# Altium PCB recall_mcu_2L_v0_1.PcbDoc
Units mil, origin at the board's own origin, x right, y up, seen from the top; angles counter-clockwise.
Board outline 1000 x 1000 mil, 2 copper layers (Component Side, Bottom Layer), stack 12.8 mil thick; 11 components, 9 nets, 34 pads, 4 vias.
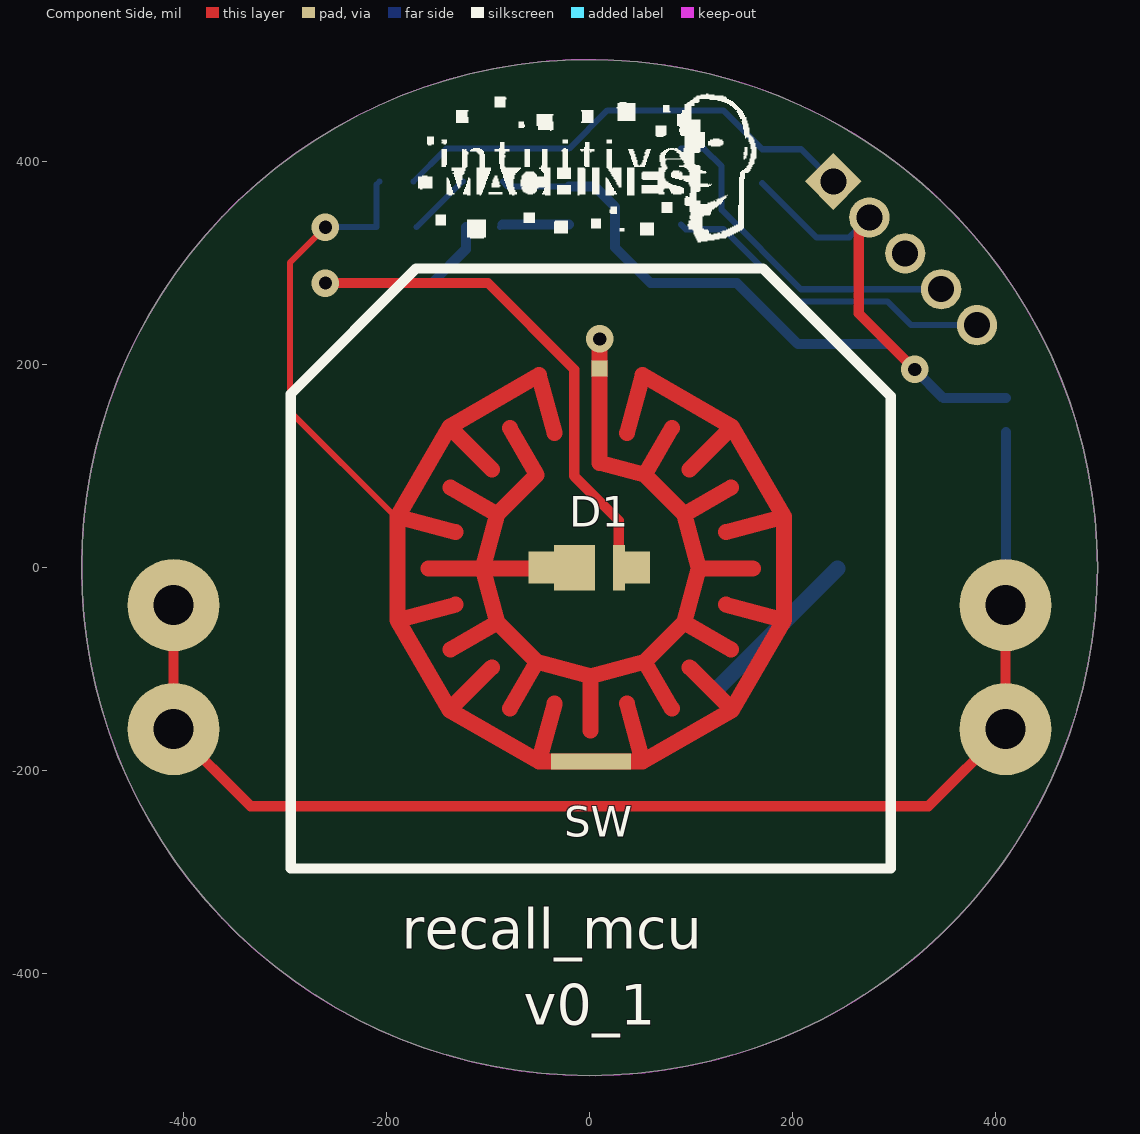
[diagram p0: Component Side view]
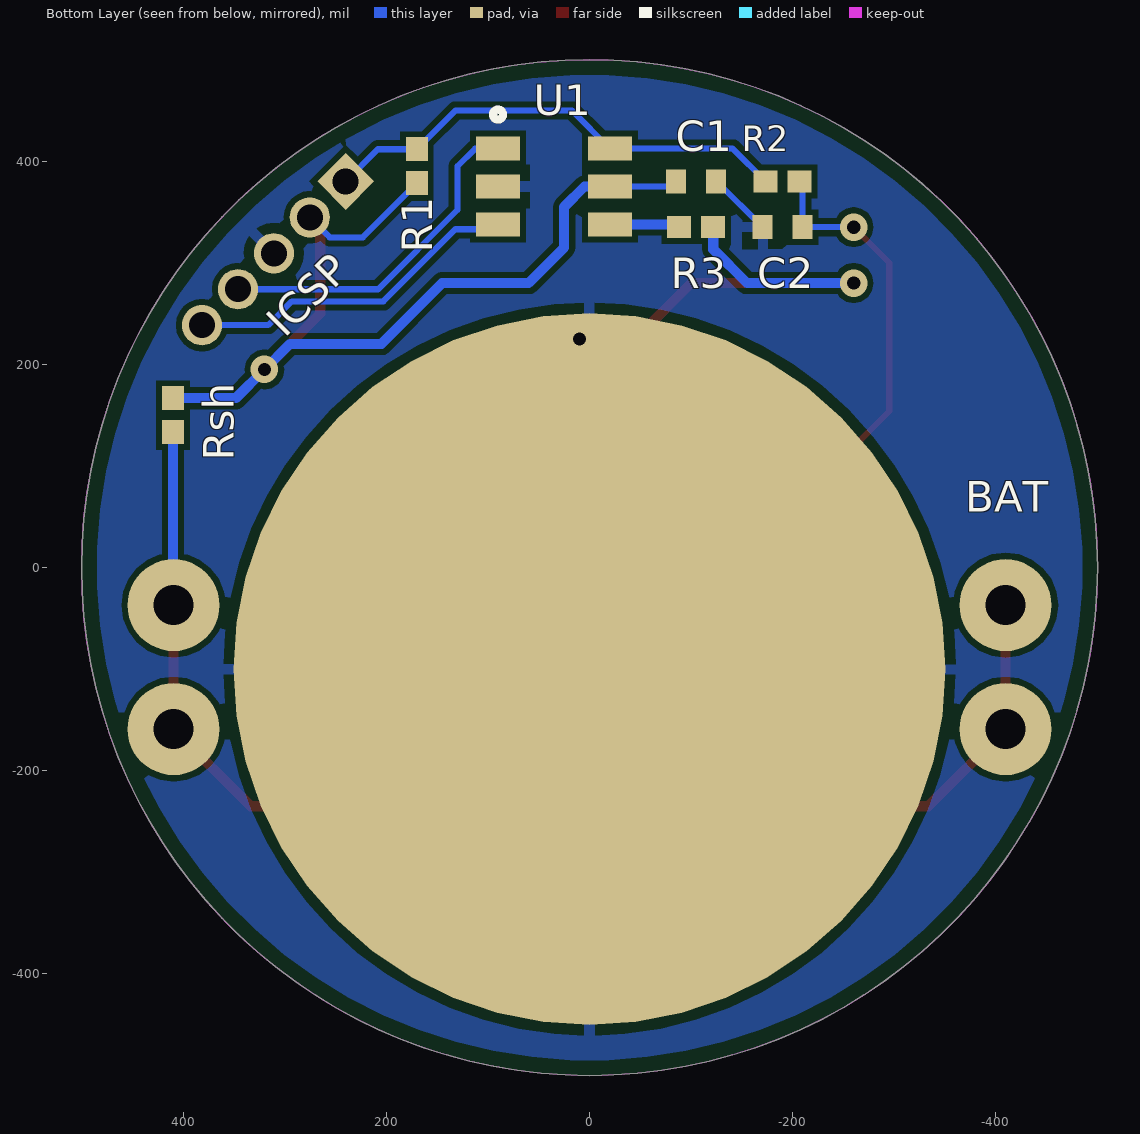
[diagram p1: Bottom Layer view, seen from below]
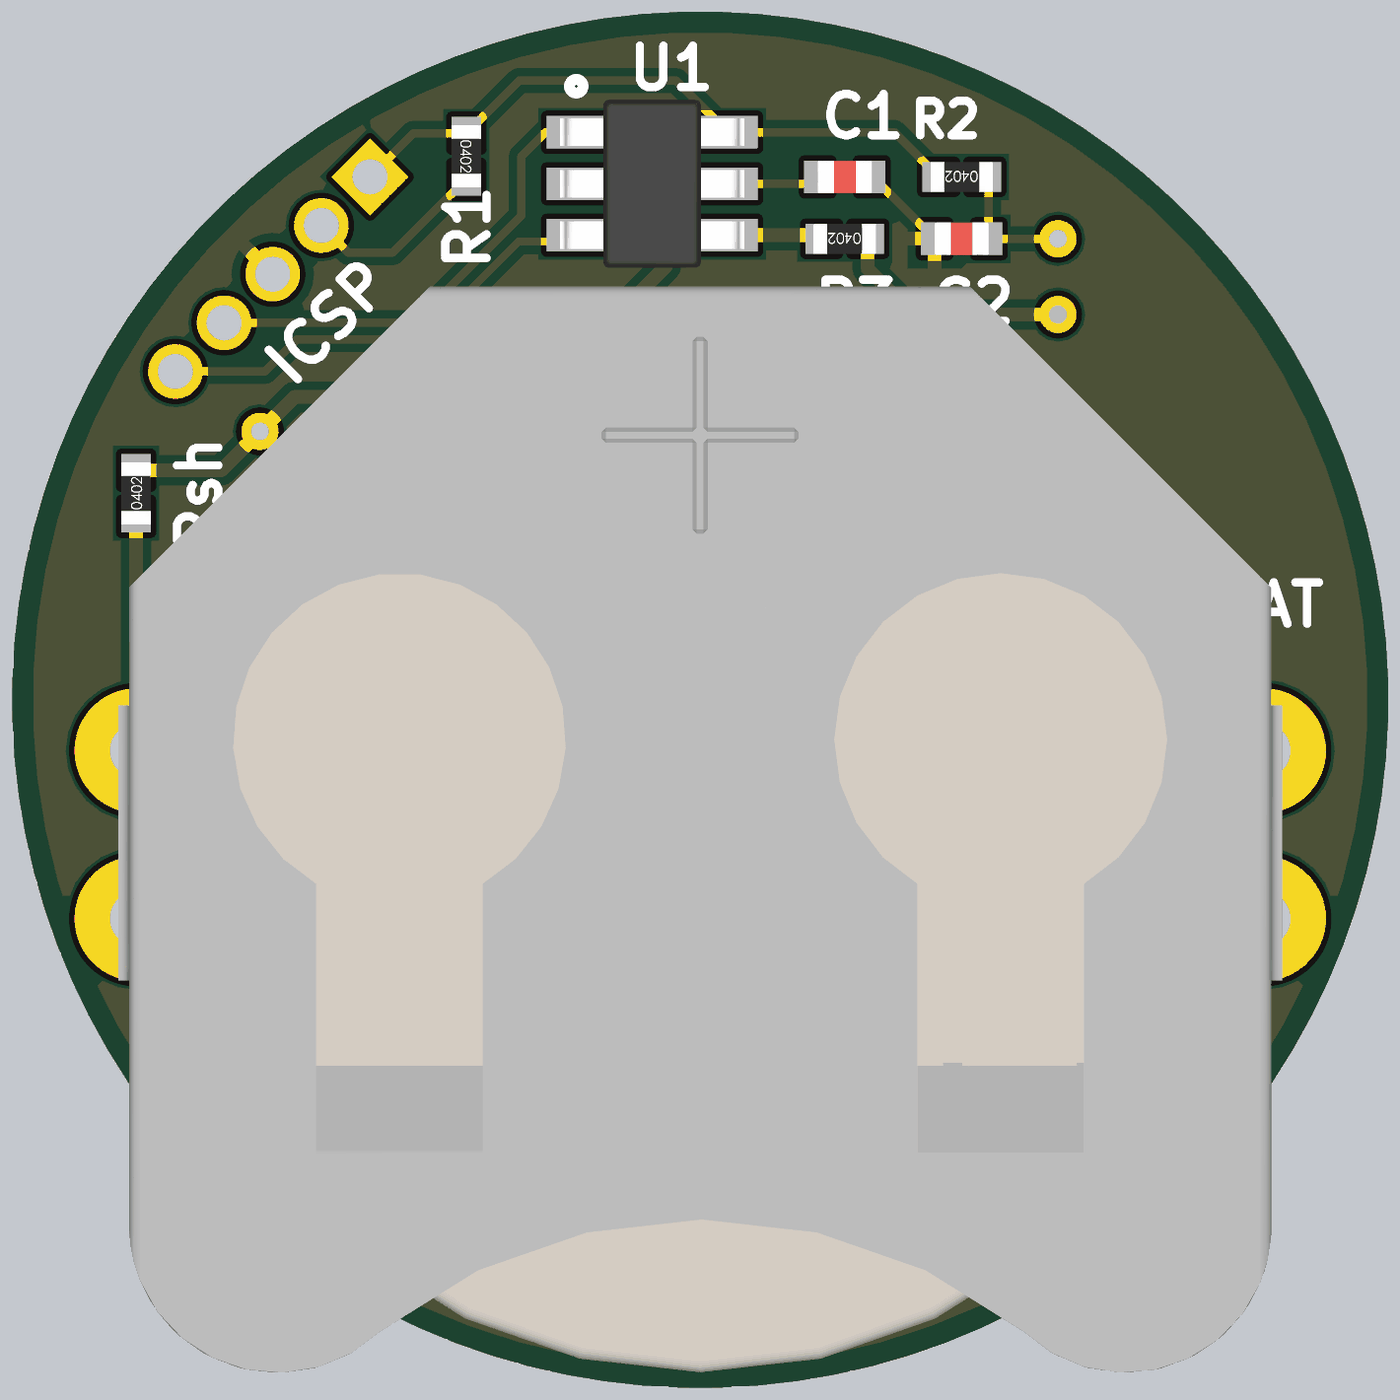
[diagram p2: 3D render of the assembled board from below, using the file's embedded part models]

## Layer stack, top to bottom
Top Solder: solder mask 0.4, Solder Resist, Dk 3.5
Component Side: signal copper 1.4
Dielectric 1: core 10, FR-4, Dk 4.2
Bottom Layer: signal copper 1.4
Solder Side: solder mask 0.4, Solder Resist, Dk 3.5

## Board outline
0,-500 cw(c0,0) -500,0 cw(c0,0) 0,500 cw(c0,0) 500,0 cw(c0,0)

## Design rules (kind name [scope] priority, off if disabled: settings)
BoardOutlineClearance [All] p1: gap=15
Clearance [All] p1: gap=6
HoleSize [All] p1: absolutevalues=TRUE maxlimit=100 minlimit=13 maxpercent=80.000 minpercent=20.000
HoleToHoleClearance [All] p1: gap=6 allowstackedmicrovias=TRUE
MinimumAnnularRing [All] p1: minimumring=7
MinimumSolderMaskSliver [All] p1: minsoldermaskwidth=0
PolygonConnect [All] p1: connectstyle=Relief reliefconductorwidth=10 reliefentries=4 polygonreliefangle="90 Angle" airgapwidth=10
RoomDefinition recall_mcu_2L_v0_1 [InComponentClass('recall_mcu_2L_v0_1')] p1: confinementstyle=ConfineIn formatcopy=TRUE lockcomponents=FALSE outline -3105,-2070 3685,-2070 3685,2625 -3105,2625
RoutingVias [All] p1: holewidth=13 width=27 viastyle="Through Hole" minholewidth=13 minwidth=27 maxholewidth=28 maxwidth=50
SilkToSilkClearance [All] p1: silktosilkclearance=6
SilkToSolderMaskClearance [IsPad] p1: minsilkscreentomaskgap=6 clearancetoexposedcopper=TRUE
SolderMaskExpansion [All] p1: expansion=4
Width [All] p1: maxlimit=50 minlimit=6 preferedwidth=6
25 further rules are at their usual default settings.

## Components (designator, comment, footprint, x,y, rotation, side; value= is the part's Value field where it differs from the comment)
BAT "CR2032" BAT-HLD-001-THM 0,-100 r0 bottom
C1 "CAP" CAP_0402R -105,380 r0 bottom
C2 "CAP" CAP_0402R -190,335 r180 bottom
D1 "MP2016" MP2016_centered 0,0 r0 top
ICSP "Header 5" HDR1X5_ICSP 240,380 r315 bottom
R1 "RES" RES_0402 170,395 r270 bottom
R2 "RES" RES_0402 -190,380 r0 bottom
R3 "RES" RES_0402 -105,335 r0 bottom
Rsh "RES" RES_0402 410,150 r90 bottom
SW "SW-PB" TRELLIS_1x1_2L 0,0 r90 top
U1 "PIC10F320" SOT-23-6 35,375 r180 bottom

## Footprints (in the part's own frame and the unit in brackets; to place one, negate y for a bottom-side part, rotate by r counter-clockwise, add the part's x,y. Pads: shape width x height; smd on the part's side, far side on the other; paste and mask are expansions set on the pad)
BAT-HLD-001-THM [mm] "Battery holder for CR2032"
  round 2.3 hole 1: 1(-10.4,-1.6) 1(-10.4,1.5) 1(10.4,-1.6) 1(10.4,1.5)
  round 17.8 smd: 2(0,0)
  body extent -10.74,-10.17 10.74,9.88, height 3.96
CAP_0402R [mm] "Capacitor 0402 reflow soldering"
  rect 0.5x0.6 smd: 1(-0.5,0) 2(0.5,0)
  body extent -0.5,-0.3 0.5,0.3, height 0.2
HDR1X5_ICSP [mm] "Connector; Header; 1x5Position"
  rect 1.006x1.006 hole 0.65: 1(0,0)
  round 1.006 hole 0.65: 2(1.27,0) 3(2.54,0) 4(3.81,0) 5(5.08,0)
MP2016_centered [mm] "Luminus XNOVA LED"
  rect 0.3x1.14 smd: A(0.731,0)
  rect 1.02x1.14 smd: C(-0.379,0)
  rect 0.65x0.8 smd: ""(-1.204,0) ""(1.181,0)
  body extent -1,-0.8 1,0.8, height 0.55
RES_0402 [mm]
  rect 0.6x0.55 smd: 1(-0.425,0) 2(0.425,0)
  body extent -0.58,-0.28 0.57,0.27, height 0.41
SOT-23-6 [mm] "PIC10F320"
  rect 1.1x0.6 smd: 1(-1.4,0.95) 2(-1.4,0) 3(-1.4,-0.95) 4(1.4,-0.95) 5(1.4,0) 6(1.4,0.95)
  silkscreen extent -1.53,1.68 -1.28,1.92, body extent -1.7,-1.55 1.7,1.55, height 1.14
TRELLIS_1x1_2L [mil]
  rect 15.75x78.74 smd: 1(-190.98,-1.57)
  rect 15.75x15.75 smd: 2(196,-10)
  Component Side lines w15.75: -0.83,158.28 -0.83,107.13 -0.83,106.79 -0.83,105.13 ; -80.55,136.91 -53.98,90.88 ; 78.9,136.91 52.32,90.88 ; -36.49,131.93 -51.78,188.97 ; 34.84,131.93 50.12,188.97 ; -98.26,96.26 -140.02,138.02 ; 96.61,96.26 138.37,138.02 ; -138.91,78.55 -92.88,51.98 ; 137.26,78.55 91.23,51.98 52.32,90.88 ; -133.93,34.49 -190.97,49.78 ; 132.27,34.49 189.32,49.78 138.37,138.02 ; -160.28,-1.17 -107.13,-1.17 ; 195,-10 103.1,-10 91.23,-54.32 ; -133.93,-36.84 -190.97,-52.12 ; 132.27,-36.84 189.32,-52.12 138.37,-140.37 ; -138.91,-80.9 -92.88,-54.32 ; 137.26,-80.9 91.23,-54.32 ; -98.26,-98.61 -140.02,-140.37 ; 96.61,-98.61 138.37,-140.37 ; -36.49,-134.27 -51.78,-191.32 ; 34.84,-134.27 50.12,-191.32 ; -80.55,-139.26 -53.98,-93.23 ; 78.9,-139.26 52.32,-93.23 ; -0.83,-160.62 -0.83,-107.47 ; -51.78,188.97 50.12,188.97 ; -51.78,188.97 -140.02,138.02 ; 50.12,188.97 138.37,138.02 ; -140.02,138.02 -190.97,49.78 ; -0.83,105.13 52.32,90.88 ; -0.83,105.13 -1.17,105.04 -53.98,90.88 ; -53.98,90.88 -92.88,51.98 ; -92.88,51.98 -107.13,-1.17 ; -190.97,49.78 -190.97,-52.12 ; -107.13,-1.17 -92.88,-54.32 ; -190.97,-52.12 -140.02,-140.37 ; -92.88,-54.32 -53.98,-93.23 ; 91.23,-54.32 52.32,-93.23 ; -53.98,-93.23 -0.83,-107.47 ; 52.32,-93.23 -0.83,-107.47 ; -140.02,-140.37 -51.78,-191.32 ; 138.37,-140.37 50.12,-191.32 ; -51.78,-191.32 50.12,-191.32
  silkscreen extent -296,-296 294,294, body extent -296,-297 295,294, height 455

## Part data
BAT: library part Battery
C1 C2: "Capacitor"
D1: "MP2016 White LED"
ICSP: "Header, 5-Pin"
R1 R2 R3 Rsh: "Resistor"
SW: "Translucent Conductive Silicone Elastomer Switch"
U1: "6-Pin Flash-Based, 8-Bit Microcontroller"

## Via types
v1: diameter 27, hole 13, Component Side to Bottom Layer, 4 vias

## Nets (pads, with @x,y where several pads share a name; then routed paths per layer and width w, separated by ;. In a path a pad name is that pad's centre, name@x,y a point inside that pad or via, vN(x,y) a via of type N, cw(c..) or ccw(c..) an arc to the next point about the centre after c; other vN are vias at no path point)
GND: BAT.2 C1.1 C2.1 D1.@-47.42,0 D1.C ICSP.3 SW.2 U1.2 | length 374.2
  Component Side w15.75: -107.13,-1.17 -105.04,-1.17 -16.11,-1.17 D1.C ; SW.2 v1(10,225)
  Bottom Layer w6: C2.1 -125.31,380 C1.1 ; ICSP.3 ICSP.3@315.71,314.29
  Bottom Layer w10: ICSP.3@301.42,300 ICSP.3
  Bottom Layer w15.75: BAT.2@125,-120 BAT.2@243.83,-1.17
ICSP_CLK: ICSP.5 U1.3 | length 332.3
  Bottom Layer w6: U1.3 94.72,333 132,333 203.07,261.93 293.07,261.93 316.42,238.58 ICSP.5
ICSP_DAT: ICSP.4 U1.1 | length 340
  Bottom Layer w6: U1.1 112.6,412.4 130,395 130,351.97 208.04,273.93 ICSP.4 ; ICSP.4@350,285 ICSP.4@351.07,283.93
NetC2_2: C2.2 R2.1 SW.1 | length 439.3
  Component Side w6: v1(-260,335) -295,300 -295,153.81 -190.97,49.78
  Bottom Layer w6: v1(-260,335) C2.2 -209.69,377.05 R2.1
NetD1_A: D1.@46.48,0 D1.A R3.1 | length 667.1
  Component Side w10: v1(-260,280) -100,280 -15,195 -15,90 28.76,46.24 D1.A
  Bottom Layer w10: v1(-260,280) -155,280 -121.73,313.27 R3.1
NetR3_2: R3.2 U1.4 | length 69.2
  Bottom Layer w6: R3.2 R3.2@-85.67,337.6
  Bottom Layer w10: R3.2@-85.67,337.6 U1.4
VBAT: BAT.1 Rsh.1 | length 1315.6
  Component Side w10: BAT.1@-409.45,-37.01 -409.45,-159.06 -333.5,-235 333.5,-235 409.45,-159.06 BAT.1@409.45,-37.01
  Bottom Layer w10: BAT.1@410,-56.46 Rsh.1
VDD: C1.2 ICSP.2 R1.2 Rsh.2 U1.5 | length 919.4
  Component Side w10: ICSP.2 265,334.29 265,250 v1(320,195)
  Bottom Layer w6: C1.2 -80.31,375 U1.5 ; R1.2 223.27,325 255.71,325 ICSP.2
  Bottom Layer w10: U1.5 5,375 25,355 25,315 60,280 145,280 205,220 295,220 v1(320,195) 348.27,166.73 Rsh.2
VPP: ICSP.1 R1.1 R2.2 U1.6 | length 471.3
  Bottom Layer w6: R2.2 -140.87,412.4 U1.6 17.48,450 131.73,450 R1.1 208.27,411.73 ICSP.1

## Polygon pours and split planes (outlines as drawn)
GND on Bottom Layer "Ground" (solid, remove dead copper, pour order 4): 0,-500 cw(c0,0) -500,0 cw(c0,0) 0,500 cw(c0,0) 500,0 cw(c0,0)

## Keep-outs
Keep-Out Layer:
  circle w1: c0,0 r500

## Silkscreen, mask and mechanical layers (free items; w line width, h text height)
Top Overlay:
  drawing of 44 lines, arcs and shapes, not listed
  text "recall_mcu" at -185,-375 h40
  text "v0_1" at -65,-450 h40